# Altium PCB TFTAdapter Version 3.PcbDoc (part 3 of 3)
Units mm, origin at the board's own origin, x right, y up, seen from the top; angles counter-clockwise.
Board outline 130 x 67 mm, 4 copper layers (L1, L2, L3, L4), stack 0.905 mm thick; 77 components, 105 nets, 466 pads, 376 vias.
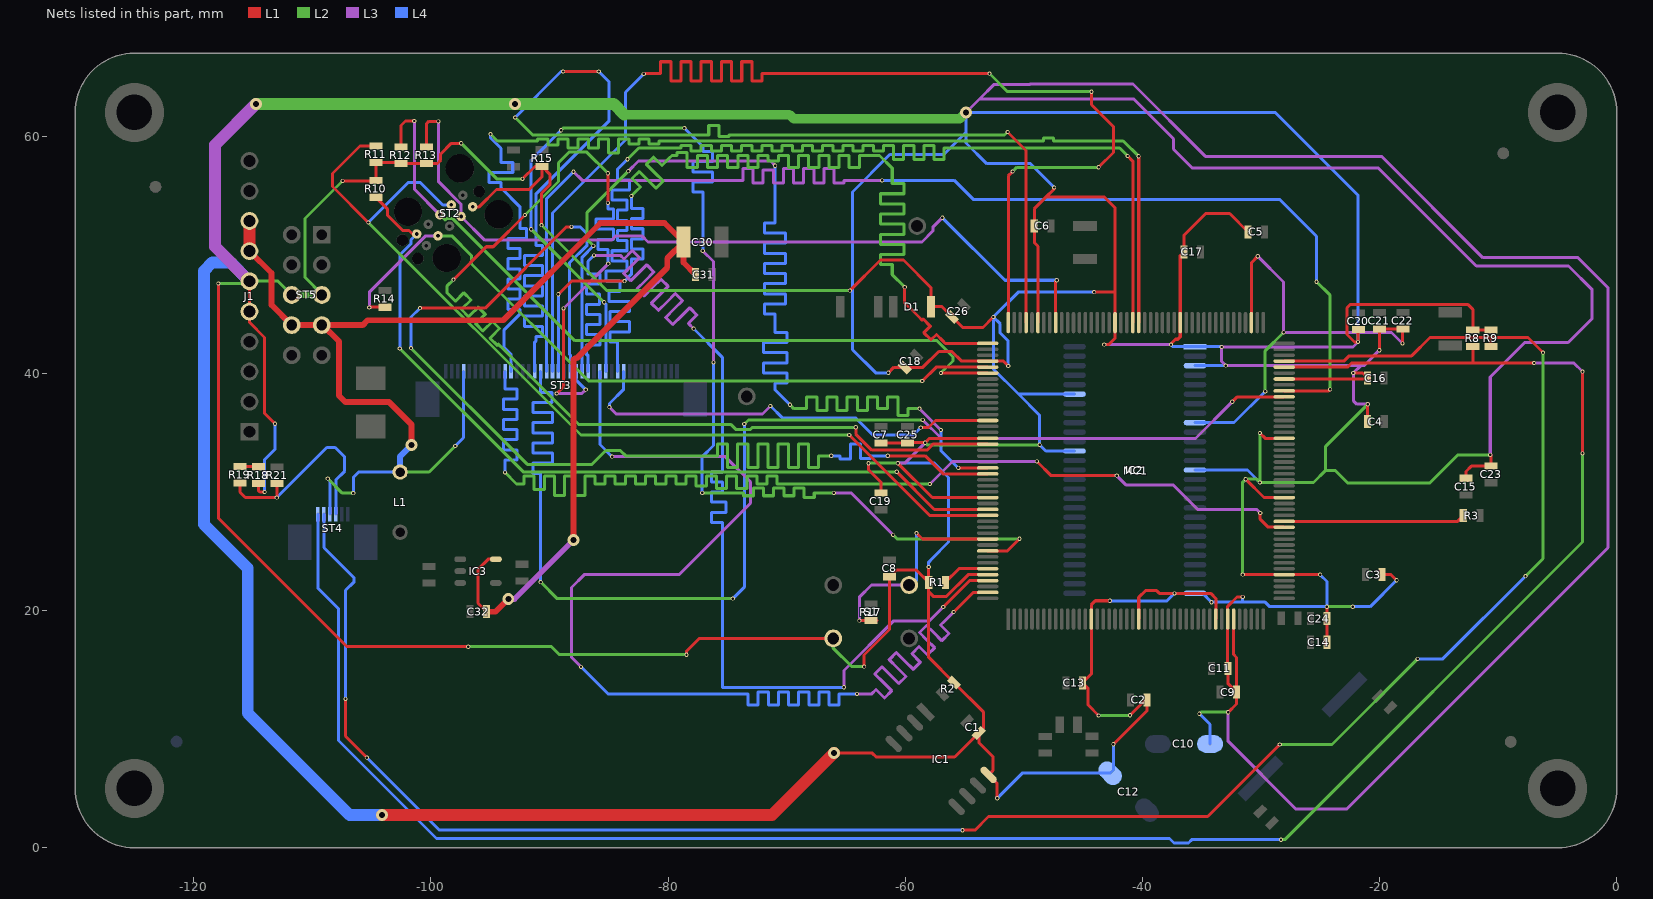
[diagram p5: the nets of this part, all layers, seen from the top]

## Via types
v1: diameter 0.35, hole 0.2, L1 to L4, 362 vias
v2: diameter 1, hole 0.5, L1 to L4, 14 vias

## Nets (pads, with @x,y where several pads share a name; then routed paths per layer and width w, separated by ;. In a path a pad name is that pad's centre, name@x,y a point inside that pad or via, vN(x,y) a via of type N, cw(c..) or ccw(c..) an arc to the next point about the centre after c; other vN are vias at no path point) (continued)
NetMC1_57: MC1.57 ST3.11 | length 111
  L1 w0.254: v1(-48.9,32.575) -47.7,31.375 v1(-42.175,31.375) ; v1(-30.075,28.225) -30.075,27.7 -29.4,27.025 MC1.57@-28.05,27.025
  L3 w0.254: v1(-57.925,30.675) -56.025,32.575 v1(-48.9,32.575) ; v1(-42.175,31.375) -41.4,30.6 -37.425,30.6 -35.325,28.5 -30.35,28.5 v1(-30.075,28.225)
  L2 w0.254: v1(-93.75,31.65) -92.775,30.675 -92.575,30.675 -92.148,30.675 -92.148,31.34 -91.294,31.34 -91.294,30.675 -91.294,30.226 -90.44,30.226 -90.44,30.675 -90.44,31.34 -89.586,31.34 -89.586,30.675 -89.586,29.685 -88.732,29.685 -88.732,30.675 -88.732,31.34 -87.878,31.34 -87.878,30.675 -87.878,29.685 -87.024,29.685 -87.024,30.675 -87.024,31.34 -86.17,31.34 -86.17,30.675 -85.316,30.675 -85.316,31.34 -84.462,31.34 -84.462,30.675 -83.608,30.675 -83.608,31.34 -82.754,31.34 -82.754,30.675 -81.9,30.675 -81.9,31.34 -81.046,31.34 -81.046,30.675 -80.192,30.675 -80.192,31.34 -79.338,31.34 -79.338,30.675 -78.484,30.675 -78.484,31.34 -77.63,31.34 -77.63,30.675 -77.63,30.502 -76.776,30.502 -76.776,30.675 -76.776,31.34 -75.922,31.34 -75.922,30.675 -75.922,30.285 -75.068,30.285 -75.068,30.675 -75.068,31.34 -74.214,31.34 -74.214,30.675 -74.214,30.285 -73.36,30.285 -73.36,30.675 -73.36,31.34 -72.506,31.34 -72.506,30.675 -71.652,30.675 -71.652,31.34 -70.798,31.34 -70.798,30.675 -70.45,30.675 v1(-57.925,30.675)
  L4 w0.254: v1(-93.75,31.65) -93.75,32.025 -93.75,32.695 -92.75,32.695 -92.75,33.549 -93.75,33.549 -93.896,33.549 -93.896,34.403 -93.75,34.403 -92.75,34.403 -92.75,35.257 -93.75,35.257 -93.896,35.257 -93.896,36.111 -93.75,36.111 -92.75,36.111 -92.75,36.965 -93.75,36.965 -93.896,36.965 -93.896,37.819 -93.75,37.819 -92.75,37.819 -92.75,38.673 -93.75,38.673 -93.75,39.1 ST3.11@-93.75,40.175
NetMC1_58: MC1.58 R3.2 | length 15.3
  L1 w0.254: MC1.58@-28.05,27.525 -13.425,27.525 R3.2@-12.95,28
NetMC1_79: MC1.79 ST3.17 | length 110.5
  L1 w0.254: v1(-32.425,37.6) -32,38.025 MC1.79@-28.05,38.025
  L3 w0.254: v1(-58.525,36.075) -56.95,34.5 -35.525,34.5 v1(-32.425,37.6)
  L2 w0.254: v1(-90.75,22.4) -89.35,21 v1(-74.55,21) ; v1(-73.575,35.725) -73.225,36.075 v1(-58.525,36.075)
  L4 w0.254: v1(-90.75,22.4) -90.75,31.125 -90.75,31.566 -91.396,31.566 -91.396,32.42 -90.75,32.42 -89.75,32.42 -89.75,33.274 -90.75,33.274 -91.396,33.274 -91.396,34.128 -90.75,34.128 -89.75,34.128 -89.75,34.982 -90.75,34.982 -91.396,34.982 -91.396,35.836 -90.75,35.836 -89.75,35.836 -89.75,36.69 -90.75,36.69 -91.396,36.69 -91.396,37.544 -90.75,37.544 -89.802,37.544 -89.802,38.398 -90.75,38.398 -90.75,38.825 ST3.17@-90.75,40.175 ; v1(-74.55,21) -73.575,21.975 v1(-73.575,35.725)
NetMC1_80: MC1.80 ST3.18 | length 111.9
  L1 w0.254: MC1.80@-28.05,38.525 -24.3,38.525 v1(-24.175,38.65)
  L3 w0.254: v1(-87.975,57) -87.25,56.275 -73.875,56.275 -73.692,56.275 -73.692,57.275 -72.838,57.275 -72.838,56.275 -72.838,56.054 -71.984,56.054 -71.984,56.275 -71.984,57.129 -71.13,57.129 -71.13,56.275 -71.13,56.054 -70.276,56.054 -70.276,56.275 -70.276,57.275 -69.422,57.275 -69.422,56.275 -69.422,56.054 -68.568,56.054 -68.568,56.275 -68.568,57.275 -67.714,57.275 -67.714,56.275 -67.714,56.054 -66.86,56.054 -66.86,56.275 -66.86,57.275 -66.006,57.275 -66.006,56.275 -66.006,56.054 -65.152,56.054 -65.152,56.275 -64.725,56.275 v1(-61.95,56.275)
  L2 w0.254: v1(-25.325,47.725) -24.175,46.575 v1(-24.175,38.65)
  L4 w0.254: ST3.18@-90.25,40.175 -90.25,54.725 v1(-87.975,57) ; v1(-61.95,56.275) -55.875,56.275 -54.275,54.675 -28.45,54.675 -25.325,51.55 v1(-25.325,47.725)
NetMC1_84: MC1.84 R8.1 ST4.1 | length 180.1
  L1 w0.254: MC1.84@-28.05,40.525 -22.725,40.525 -22.375,40.875 -12.175,40.875 ; R8.1@-12.15,42.25 -12.15,40.9 -12.175,40.875 ; v1(-6.975,40.875) -12.175,40.875 ; v1(-2.9,33.25) v1(-2.9,40.15)
  L3 w0.254: v1(-6.975,40.875) -3.625,40.875 v1(-2.9,40.15)
  L2 w0.254: v1(-28.325,0.675) -28,0.675 -2.9,25.775 v1(-2.9,33.25)
  L4 w0.254: ST4.1@-109.525,28.125 -109.525,21.875 -107.8,20.15 -107.8,9.05 -99.525,0.775 -37.725,0.775 -37.35,0.4 -36.125,0.4 -35.85,0.675 v1(-28.325,0.675)
NetMC1_85: MC1.85 R9.1 ST4.2 | length 175.2
  L1 w0.254: v1(-107.2,12.55) -107.2,9.4 v1(-105.4,7.6) ; v1(-55.175,1.475) -54.131,1.475 -52.981,2.625 -34.5,2.625 v1(-28.425,8.7) ; MC1.85@-28.05,41.025 -23.025,41.025 -22.575,41.475 -17.3,41.475 -15.75,43.025 -10.65,43.025 ; R9.1@-10.625,42.25 -10.625,43 -10.65,43.025 ; v1(-6.225,41.75) -7.5,43.025 -10.65,43.025
  L2 w0.254: v1(-28.425,8.7) -24.025,8.7 v1(-16.8,15.925) ; v1(-7.7,22.9) -6.225,24.375 v1(-6.225,41.75)
  L4 w0.254: ST4.2@-109.025,28.125 -109.025,25.3 -106.475,22.75 -106.475,22.425 -107.2,21.7 v1(-107.2,12.55) ; v1(-105.4,7.6) -99.275,1.475 v1(-55.175,1.475) ; v1(-16.8,15.925) -14.675,15.925 v1(-7.7,22.9)
NetMC1_110: MC1.110 ST3.12 | length 112.7
  L1 w0.254: v1(-40.325,58.3) -40.315,58.29 MC1.110@-40.315,44.279
  L2 w0.254: v1(-94.975,60.175) -94.4,59.6 -91.425,59.6 -90.998,59.6 -90.998,59.744 -90.144,59.744 -90.144,59.6 -90.144,59.252 -89.29,59.252 -89.29,59.6 -89.29,59.744 -88.436,59.744 -88.436,59.6 -88.436,59.004 -87.582,59.004 -87.582,59.6 -87.582,59.744 -86.728,59.744 -86.728,59.6 -86.728,58.982 -85.874,58.982 -85.874,59.6 -85.874,59.744 -85.02,59.744 -85.02,59.6 -85.02,58.6 -84.166,58.6 -84.166,59.6 -84.166,59.744 -83.312,59.744 -83.312,59.6 -83.312,59.354 -82.458,59.354 -82.458,59.6 -82.458,59.744 -81.604,59.744 -81.604,59.6 -81.604,59.354 -80.75,59.354 -80.75,59.6 -74.825,59.6 -48.775,59.6 -48.348,59.6 -48.348,59.839 -47.494,59.839 -47.494,59.6 -43.525,59.6 -41.625,59.6 v1(-40.325,58.3)
  L4 w0.254: v1(-94.975,60.175) -94.975,59.85 -94.1,58.975 -94.1,58.639 -94.1,57.785 -93.1,57.785 -93.1,56.931 -94.1,56.931 -95.1,56.931 -95.1,56.077 -94.1,56.077 -94.1,55.65 -92.5,54.05 -92.5,52.375 -92.5,52.234 -91.952,52.234 -91.952,51.38 -92.5,51.38 -93.5,51.38 -93.5,50.526 -92.5,50.526 -92.5,49.672 -93.5,49.672 -93.5,48.818 -92.5,48.818 -92.5,47.964 -93.5,47.964 -93.5,47.11 -92.5,47.11 -92.5,46.256 -93.5,46.256 -93.5,45.402 -92.5,45.402 -92.5,44.975 -93.85,43.625 -93.85,42.225 -93.25,41.625 ST3.12@-93.25,40.175
NetMC1_111: MC1.111 ST3.30 | length 112.7
  L1 w0.254: v1(-41.25,58.325) -40.815,57.89 MC1.111@-40.815,44.279
  L2 w0.254: v1(-83.425,58.05) -82.475,59 -79.35,59 -78.923,59 -78.923,59.225 -78.069,59.225 -78.069,59 -78.069,58.75 -77.215,58.75 -77.215,59 -77.215,59.225 -76.361,59.225 -76.361,59 -76.361,58.75 -75.507,58.75 -75.507,59 -75.507,59.225 -74.653,59.225 -74.653,59 -74.653,58.75 -73.799,58.75 -73.799,59 -73.799,59.225 -72.945,59.225 -72.945,59 -72.945,58.75 -72.091,58.75 -72.091,59 -72.091,59.225 -71.237,59.225 -71.237,59 -71.237,58.75 -70.383,58.75 -70.383,59 -70.383,59.225 -69.529,59.225 -69.529,59 -69.529,58.75 -68.675,58.75 -68.675,59 -68.675,59.225 -67.821,59.225 -67.821,59 -67.821,58.75 -66.967,58.75 -66.967,59 -66.967,59.225 -66.113,59.225 -66.113,59 -66.113,58.75 -65.259,58.75 -65.259,59 -65.259,59.225 -64.405,59.225 -64.405,59 -64.405,58.75 -63.551,58.75 -63.551,59 -63.551,59.225 -62.697,59.225 -62.697,59 -62.697,58.75 -61.843,58.75 -61.843,59 -61.843,59.225 -60.989,59.225 -60.989,59 -60.989,58.021 -60.135,58.021 -60.135,59 -60.135,59.225 -59.281,59.225 -59.281,59 -59.281,58.021 -58.427,58.021 -58.427,59 -58.427,59.225 -57.573,59.225 -57.573,59 -57.573,58.021 -56.719,58.021 -56.719,59 -54.35,59 -41.925,59 v1(-41.25,58.325)
  L4 w0.254: ST3.30@-84.25,40.175 -84.25,42.225 -84.25,42.652 -84.896,42.652 -84.896,43.506 -84.25,43.506 -83.25,43.506 -83.25,44.36 -84.25,44.36 -84.896,44.36 -84.896,45.214 -84.25,45.214 -83.25,45.214 -83.25,46.068 -84.25,46.068 -84.971,46.068 -84.971,46.922 -84.25,46.922 -84.077,46.922 -84.077,47.776 -84.25,47.776 -85.25,47.776 -85.25,48.63 -84.25,48.63 -83.454,48.63 -83.454,49.484 -84.25,49.484 -84.721,49.484 -84.721,50.338 -84.25,50.338 -83.454,50.338 -83.454,51.192 -84.25,51.192 -84.25,52.046 -83.454,52.046 -83.454,52.9 -84.25,52.9 -84.25,53.754 -83.454,53.754 -83.454,54.608 -84.25,54.608 -84.747,54.608 -84.747,55.462 -84.25,55.462 -83.25,55.462 -83.25,56.316 -84.25,56.316 -84.25,57.1 -84.25,57.225 v1(-83.425,58.05)
NetMC1_124: MC1.124 R13.1 ST2.2 | length 70.1
  L1 w0.254: R13.1@-100.375,59.1 -100.375,61.05 -100.175,61.25 v1(-99.375,61.25) ; MC1.124@-47.315,44.279 -47.315,47.76 v1(-47.225,47.85)
  L3 w0.254: v1(-99.375,61.25) -99.375,56.187 -97.459,54.27 ST2.2@-97.459,53.227 -95.457,51.225 -84.775,51.225 -84.4,51.6 -82.225,51.6 -81.7,51.075 -58.6,51.075 -57.675,52 -57.675,52.325 v1(-56.875,53.125)
  L4 w0.254: v1(-56.875,53.125) -51.6,47.85 v1(-47.225,47.85)
NetMC1_129: MC1.129 ST3.16 | length 111
  L1 w0.254: v1(-88.85,65.45) v1(-85.85,65.45) ; v1(-51.375,60.35) -49.815,58.79 MC1.129@-49.815,44.279
  L2 w0.254: v1(-92.9,61.575) -91.423,60.098 -77,60.098 -76.573,60.098 -76.573,60.919 -75.719,60.919 -75.719,60.098 -75.719,59.971 -74.865,59.971 -74.865,60.098 -73.125,60.098 -51.627,60.098 v1(-51.375,60.35)
  L4 w0.254: v1(-92.9,61.575) -89.025,65.45 v1(-88.85,65.45) ; ST3.16@-91.25,40.175 -91.25,42.625 -91.125,42.75 -91.125,43.112 -90.604,43.112 -90.604,43.966 -91.125,43.966 -92.125,43.966 -92.125,44.82 -91.125,44.82 -90.604,44.82 -90.604,45.674 -91.125,45.674 -92.125,45.674 -92.125,46.528 -91.125,46.528 -90.604,46.528 -90.604,47.382 -91.125,47.382 -92.125,47.382 -92.125,48.236 -91.125,48.236 -90.604,48.236 -90.604,49.09 -91.125,49.09 -92.125,49.09 -92.125,49.944 -91.125,49.944 -90.604,49.944 -90.604,50.798 -91.125,50.798 -91.125,51.225 -91.125,55.15 -84.975,61.3 -84.975,64.575 v1(-85.85,65.45)
NetMC1_132: MC1.132 ST3.19 | length 110.8
  L1 w0.254: v1(-82.05,65.25) -82.025,65.275 -81.05,65.275 -80.623,65.275 -80.623,66.275 -79.769,66.275 -79.769,65.275 -79.769,64.652 -78.915,64.652 -78.915,65.275 -78.915,66.275 -78.061,66.275 -78.061,65.275 -78.061,64.652 -77.207,64.652 -77.207,65.275 -77.207,66.275 -76.353,66.275 -76.353,65.275 -76.353,64.652 -75.499,64.652 -75.499,65.275 -75.499,66.275 -74.645,66.275 -74.645,65.275 -74.645,64.652 -73.791,64.652 -73.791,65.275 -73.791,66.275 -72.937,66.275 -72.937,65.275 -72.937,64.652 -72.083,64.652 -72.083,65.275 -68.775,65.275 v1(-52.9,65.275) ; MC1.132@-51.315,44.279 -51.315,56.66 v1(-50.95,57.025) ; v1(-44.3,63.75) -44.3,62.65 -42.45,60.8 -42.45,58.625 v1(-43.7,57.375)
  L2 w0.254: v1(-52.9,65.275) -51.375,63.75 v1(-44.3,63.75) ; v1(-50.95,57.025) -50.6,57.375 v1(-43.7,57.375)
  L4 w0.254: ST3.19@-89.75,40.175 -89.75,53.525 -83.6,59.675 -83.6,63.7 v1(-82.05,65.25)
NetMC1_133: MC1.133 ST3.20 | length 111
  L1 w0.254: v1(-89.25,46.675) -88.15,47.775 v1(-83.675,47.775) ; v1(-60.05,47.275) -60.05,45.95 -58.887,44.787 -58.586,44.486 -58.496,44.575 -57.892,43.971 -57.982,43.882 -58.433,43.431 -57.829,42.827 -57.378,43.278 -56.85,42.75 -56.625,42.525 MC1.133@-53.05,42.525
  L2 w0.254: v1(-83.1,54.95) -82.638,55.412 -82.336,55.714 -83.043,56.422 -82.439,57.025 -81.732,56.318 -81.025,55.611 -80.421,56.215 -81.128,56.922 -81.835,57.629 -81.231,58.233 -80.524,57.526 -79.92,58.13 -79.675,58.375 -79.248,58.375 -79.248,58.61 -78.394,58.61 -78.394,58.375 -78.394,57.375 -77.54,57.375 -77.54,58.375 -76.686,58.375 -76.686,57.375 -75.832,57.375 -75.832,58.375 -74.978,58.375 -74.978,57.375 -74.124,57.375 -74.124,58.375 -73.27,58.375 -73.27,57.375 -72.416,57.375 -72.416,58.375 -71.562,58.375 -71.562,57.902 -70.708,57.902 -70.708,58.375 -69.854,58.375 -69.854,57.375 -69,57.375 -69,58.375 -68.146,58.375 -68.146,57.375 -67.292,57.375 -67.292,58.375 -66.438,58.375 -66.438,57.375 -65.584,57.375 -65.584,58.375 -64.73,58.375 -64.73,57.375 -63.876,57.375 -63.876,58.375 -63.022,58.375 -62.425,58.375 -62.175,58.375 -61.1,57.3 -61.1,56.425 -61.1,55.998 -60.1,55.998 -60.1,55.144 -61.1,55.144 -62.1,55.144 -62.1,54.29 -61.1,54.29 -60.1,54.29 -60.1,53.436 -61.1,53.436 -62.1,53.436 -62.1,52.582 -61.1,52.582 -60.1,52.582 -60.1,51.728 -61.1,51.728 -62.1,51.728 -62.1,50.874 -61.1,50.874 -60.1,50.874 -60.1,50.02 -61.1,50.02 -62.1,50.02 -62.1,49.166 -61.1,49.166 -61.1,48.325 v1(-60.05,47.275)
  L4 w0.254: ST3.20@-89.25,40.175 v1(-89.25,46.675) ; v1(-83.675,47.775) -83.1,48.35 -83.1,48.777 -83.1,49.631 -82.1,49.631 -82.1,50.485 -83.1,50.485 -83.1,51.339 -82.1,51.339 -82.1,52.193 -83.1,52.193 -83.1,53.047 -82.1,53.047 -82.1,53.901 -83.1,53.901 -83.1,54.5 v1(-83.1,54.95)
NetMC1_137: MC1.137 R14.2 ST2.4 | length 62.7
  L1 w0.254: v1(-105.2,45.55) -105.175,45.575 R14.2@-103.875,45.575 ; v1(-58.575,39.35) -57.4,40.525 MC1.137@-53.05,40.525
  L3 w0.254: v1(-105.2,45.55) -105.2,46.842 -100.448,51.594 ST2.4@-99.404,51.594
  L2 w0.254: ST2.4@-99.404,51.594 -98.244,51.594 -96.573,49.923 -96.573,49.223 -86.7,39.35 v1(-58.575,39.35)
NetMC1_138: MC1.138 R12.1 ST2.8 | length 65.9
  L1 w0.254: R12.1@-102.525,59.1 -102.525,60.9 -102.15,61.275 v1(-101.4,61.275) ; v1(-57,40.025) MC1.138@-53.05,40.025
  L3 w0.254: v1(-101.4,61.275) -101.4,55.536 ST2.8@-99.248,53.384
  L2 w0.254: ST2.8@-99.248,53.384 -98.797,52.932 -98.691,53.038 -98.156,53.038 -87.868,42.75 -57.325,42.75 -55.975,41.4 -55.975,41.05 v1(-57,40.025)
NetMC1_146: MC1.146 ST3.31 | length 37.5
  L1 w0.254: v1(-58.7,35.425) -58.05,35.425 -57.45,36.025 MC1.146@-53.05,36.025
  L3 w0.254: v1(-84.95,37.15) -84.375,36.575 -72.05,36.575 v1(-71.375,37.25)
  L4 w0.254: v1(-84.95,37.15) -84.95,37.45 -83.75,38.65 ST3.31@-83.75,40.175 ; v1(-71.375,37.25) -70.375,36.25 -64.2,36.25 -62.75,34.8 -59.325,34.8 v1(-58.7,35.425)
NetMC1_150: MC1.150 ST3.23 | length 109.5
  L1 w0.254: v1(-98.1,47.9) -95.325,50.675 -94.75,50.675 v1(-92.075,53.35) ; v1(-89.4,38.3) -88.825,38.875 v1(-88.825,45.475) ; v1(-85.075,54.375) v1(-85.075,56.875) ; v1(-64.175,35.45) -64.175,34.875 -62.825,33.525 -58.175,33.525 -57.675,34.025 MC1.150@-53.05,34.025
  L3 w0.254: v1(-89.4,38.3) -87.275,38.3 v1(-86.95,38.625) ; v1(-88.825,45.475) v1(-85.05,49.25)
  L2 w0.254: v1(-98.1,47.9) -98.625,47.375 -98.625,46.775 -98.237,46.387 -97.936,46.086 -97.228,46.793 -96.625,46.189 -97.332,45.482 -97.431,45.382 -96.828,44.778 -96.728,44.878 -96.021,45.585 -95.417,44.981 -96.124,44.274 -96.224,44.174 -95.62,43.57 -95.52,43.67 -94.813,44.377 -94.209,43.773 -94.916,43.066 -95.016,42.967 -94.412,42.363 -94.312,42.462 -93.875,42.025 -87.55,35.7 -74.725,35.7 -74.3,35.275 -73.05,35.275 -72.875,35.45 v1(-64.175,35.45) ; v1(-92.075,53.35) -89.25,56.175 -89.25,57.75 -88.35,58.65 -86.85,58.65 v1(-85.075,56.875)
  L4 w0.254: ST3.23@-87.75,40.175 -87.75,39.425 v1(-86.95,38.625) ; v1(-85.075,54.375) -85.075,54.1 -85.075,53.868 -84.604,53.868 -84.604,53.014 -85.075,53.014 -86.075,53.014 -86.075,52.16 -85.075,52.16 -84.604,52.16 -84.604,51.306 -85.075,51.306 -85.898,51.306 -85.898,50.452 -85.075,50.452 -85.075,50.025 -85.075,49.275 v1(-85.05,49.25)
NetMC1_154: MC1.154 ST3.24 | length 110.4
  L1 w0.254: v1(-55.525,32.025) MC1.154@-53.05,32.025
  L3 w0.254: v1(-83.35,57.05) -82.5,57.9 -71.375,57.9 v1(-70.975,57.5) ; v1(-58.8,37.025) v1(-57,35.225)
  L2 w0.254: v1(-86.3,50.75) -86.825,51.275 -86.825,53.575 v1(-83.35,57.05) ; v1(-69.725,37.35) -69.4,37.025 -69.125,37.025 -68.317,37.025 -68.317,38.025 -67.463,38.025 -67.463,37.025 -67.463,36.879 -66.609,36.879 -66.609,37.025 -66.609,38.025 -65.755,38.025 -65.755,37.025 -65.755,36.879 -64.901,36.879 -64.901,37.025 -64.901,38.025 -64.047,38.025 -64.047,37.025 -64.047,36.879 -63.193,36.879 -63.193,37.025 -63.193,38.025 -62.339,38.025 -62.339,37.025 -61.485,37.025 -61.485,38.025 -60.631,38.025 -60.631,37.025 -60.631,36.429 -59.777,36.429 -59.777,37.025 -59.35,37.025 v1(-58.8,37.025)
  L4 w0.254: ST3.24@-87.25,40.175 -87.25,49.8 v1(-86.3,50.75) ; v1(-70.975,57.5) -70.975,53.05 -70.975,52.688 -71.86,52.688 -71.86,51.834 -70.975,51.834 -70.09,51.834 -70.09,50.98 -70.975,50.98 -71.86,50.98 -71.86,50.126 -70.975,50.126 -70.09,50.126 -70.09,49.272 -70.975,49.272 -71.86,49.272 -71.86,48.418 -70.975,48.418 -70.09,48.418 -70.09,47.564 -70.975,47.564 -71.86,47.564 -71.86,46.71 -70.975,46.71 -70.09,46.71 -70.09,45.856 -70.975,45.856 -71.86,45.856 -71.86,45.002 -70.975,45.002 -70.975,44.575 -70.975,43.875 -70.975,43.448 -69.975,43.448 -69.975,42.594 -70.975,42.594 -71.975,42.594 -71.975,41.74 -70.975,41.74 -69.975,41.74 -69.975,40.886 -70.975,40.886 -71.975,40.886 -71.975,40.032 -70.975,40.032 -69.975,40.032 -69.975,39.178 -70.975,39.178 -70.975,38.6 v1(-69.725,37.35) ; v1(-57,35.225) -57,33.5 v1(-55.525,32.025)
NetMC1_155: MC1.155 ST3.22 | length 109.8
  L1 w0.254: v1(-100.925,45.5) -95.425,45.5 -88.575,52.35 v1(-88.15,52.35) ; v1(-61.475,33.05) -58.325,33.05 -56.8,31.525 MC1.155@-53.05,31.525
  L2 w0.254: v1(-101.675,42.125) -91.875,32.325 -86.425,32.325 -85.25,33.5 -84.025,33.5 -83.575,33.05 -76.6,33.05 -75.842,33.05 -75.842,34.039 -74.988,34.039 -74.988,33.05 -74.988,32.065 -74.134,32.065 -74.134,33.05 -74.134,34.039 -73.28,34.039 -73.28,33.05 -73.28,32.065 -72.426,32.065 -72.426,33.05 -72.426,34.039 -71.572,34.039 -71.572,33.05 -71.572,32.065 -70.718,32.065 -70.718,33.05 -70.718,34.039 -69.864,34.039 -69.864,33.05 -69.864,32.065 -69.01,32.065 -69.01,33.05 -69.01,34.039 -68.156,34.039 -68.156,33.05 -68.156,32.065 -67.302,32.065 -67.302,33.05 -66.875,33.05 v1(-66.25,33.05)
  L4 w0.254: v1(-101.675,42.125) -101.675,44.75 v1(-100.925,45.5) ; ST3.22@-88.25,40.175 -88.25,41.556 -88.327,41.633 -88.327,49.298 -86.825,50.8 -86.825,51.75 -87.425,52.35 v1(-88.15,52.35) ; v1(-66.25,33.05) -65.65,33.05 -65.489,33.05 -65.489,32.787 -64.635,32.787 -64.635,33.05 -64.635,34.05 -63.781,34.05 -63.781,33.05 -63.781,32.827 -62.927,32.827 -62.927,33.05 -62.5,33.05 v1(-61.475,33.05)
NetMC1_161: MC1.161 R10.1 ST2.6 | length 70.5
  L1 w0.254: R10.1@-104.65,54.85 -103.675,53.875 -103.675,53.344 -102.381,52.05 -101.85,52.05 -101.551,51.751 ST2.6@-101.194,51.751 ; v1(-60.725,31.7) -57.55,28.525 MC1.161@-53.05,28.525
  L2 w0.254: v1(-102.625,42.1) -92.225,31.7 v1(-60.725,31.7)
  L4 w0.254: v1(-102.625,42.1) -102.625,49.983 -101.684,50.925 -101.684,51.261 ST2.6@-101.194,51.751
NetMC1_162: MC1.162 R11.1 ST2.9 | length 81.6
  L1 w0.254: v1(-105.275,52.725) -108.3,55.75 -108.3,56.85 -105.975,59.175 R11.1@-104.65,59.175 ; v1(-64.725,34.8) -57.95,28.025 MC1.162@-53.05,28.025
  L2 w0.254: v1(-105.275,52.725) -87.35,34.8 v1(-64.725,34.8)
  L4 w0.254: v1(-105.275,52.725) -101.925,56.075 -100.875,56.075 -99,54.2 ST2.9@-98.275,54.2
NetMC1_166: MC1.166 R17.2 S1.3 | length 19
  L1 w0.254: v1(-63.875,19.15) R17.2@-62.9,19.15 R17.2@-62.4,19.15 ; v1(-59.05,26.525) -58.55,26.025 MC1.166@-53.05,26.025
  L3 w0.254: v1(-63.875,19.15) -63.875,21.125 -62.85,22.15 S1.3@-59.675,22.15
  L4 w0.254: S1.3@-59.575,21.975 -59.05,22.5 v1(-59.05,26.525)
NetMC1_168: MC1.168 ST3.28 | length 109.2
  L1 w0.254: MC1.168@-53.05,25.025 -51.4,25.025 v1(-50.375,26.05)
  L3 w0.254: v1(-77.075,50.325) -76.175,49.425 v1(-76.175,40.925) ; v1(-66.025,29.925) -64.575,29.925 v1(-61.025,26.375)
  L2 w0.254: v1(-91.55,52.15) v1(-85.4,46) ; v1(-89.025,60.5) -88.85,60.675 v1(-78.625,60.675) ; v1(-77.125,29.925) -74.2,29.925 -73.655,29.925 -73.655,29.679 -72.801,29.679 -72.801,29.925 -72.801,30.321 -71.947,30.321 -71.947,29.925 -71.947,29.679 -71.093,29.679 -71.093,29.925 -71.093,30.321 -70.239,30.321 -70.239,29.925 -70.239,29.679 -69.385,29.679 -69.385,29.925 -69.385,30.321 -68.531,30.321 -68.531,29.925 -68.531,29.533 -67.677,29.533 -67.677,29.925 -67.25,29.925 v1(-66.025,29.925) ; v1(-61.025,26.375) -60.7,26.05 v1(-50.375,26.05)
  L4 w0.254: v1(-91.55,52.15) -91.55,57.975 v1(-89.025,60.5) ; v1(-85.4,46) -85.25,45.85 ST3.28@-85.25,40.175 ; v1(-78.625,60.675) -77.075,59.125 -77.075,58.698 -76.261,58.698 -76.261,57.844 -77.075,57.844 -77.889,57.844 -77.889,56.99 -77.075,56.99 -76.261,56.99 -76.261,56.136 -77.075,56.136 -77.889,56.136 -77.889,55.282 -77.075,55.282 -77.075,54.425 v1(-77.075,50.325) ; v1(-77.125,29.925) -77.125,32.975 -76.175,33.925 v1(-76.175,40.925)
NetMC1_171: MC1.171 R1.1 | length 4.1
  L1 w0.254: R1.1@-56.625,22.375 -55.475,23.525 MC1.171@-53.05,23.525
NetMC1_173: MC1.173 ST3.25 | length 112.1
  L1 w0.254: v1(-56.8,20.3) -54.575,22.525 MC1.173@-53.05,22.525
  L3 w0.254: v1(-86.25,49.95) -84.025,49.95 -83.723,49.648 -83.016,50.355 -82.412,49.751 -83.119,49.044 -83.747,48.416 -83.144,47.812 -82.515,48.44 -81.808,49.147 -81.204,48.544 -81.911,47.836 -82.619,47.129 -82.015,46.525 -81.308,47.233 -80.6,47.94 -79.997,47.336 -80.704,46.629 -81.411,45.922 -80.807,45.318 -80.1,46.025 -79.393,46.732 -78.789,46.128 -79.496,45.421 -80.203,44.714 -79.599,44.11 -78.892,44.817 -78.185,45.524 -77.581,44.92 -78.288,44.213 -78.25,44.175 v1(-77.85,43.775) ; v1(-65.175,13.525) -65.175,14.95 -61.025,19.1 -58,19.1 v1(-56.8,20.3)
  L4 w0.254: ST3.25@-86.75,40.175 -86.75,41.125 -86.75,41.552 -86.896,41.552 -86.896,42.406 -86.75,42.406 -85.75,42.406 -85.75,43.26 -86.75,43.26 -86.896,43.26 -86.896,44.114 -86.75,44.114 -85.75,44.114 -85.75,44.968 -86.75,44.968 -86.896,44.968 -86.896,45.822 -86.75,45.822 -85.802,45.822 -85.802,46.676 -86.75,46.676 -86.896,46.676 -86.896,47.53 -86.75,47.53 -85.75,47.53 -85.75,48.384 -86.75,48.384 -86.75,49.238 -86.75,49.45 v1(-86.25,49.95) ; v1(-77.85,43.775) -75.425,41.35 -75.425,32.975 -75.425,32.548 -75.425,31.694 -76.351,31.694 -76.351,30.84 -75.425,30.84 -75.425,29.986 -76.351,29.986 -76.351,29.132 -75.425,29.132 -75.13,29.132 -75.13,28.278 -75.425,28.278 -76.351,28.278 -76.351,27.424 -75.425,27.424 -75.425,26.225 -75.425,13.525 v1(-65.175,13.525)
NetMC1_175: MC1.175 ST3.27 | length 112.1
  L1 w0.254: v1(-55.925,19.875) -54.275,21.525 MC1.175@-53.05,21.525
  L3 w0.254: v1(-87.35,15.25) -88.15,16.05 -88.15,21.95 -87.075,23.025 -79.075,23.025 -73.05,29.05 -73.05,30.85 -75.175,32.975 v1(-84.725,32.975) ; v1(-64.075,12.975) -62.825,12.975 -62.462,13.338 -61.755,12.631 -61.151,13.235 -61.858,13.942 -62.565,14.649 -61.961,15.253 -61.254,14.546 -60.547,13.839 -59.943,14.443 -60.65,15.15 -61.357,15.857 -60.753,16.461 -60.046,15.754 -59.339,15.047 -58.735,15.65 -59.442,16.358 -58.839,16.961 -58.131,16.254 -57.528,16.858 -58.235,17.565 -58.812,18.142 -58.208,18.746 -57.631,18.169 -56.924,17.462 -56.32,18.066 -57.027,18.773 -56.725,19.075 v1(-55.925,19.875)
  L4 w0.254: v1(-87.35,15.25) -85.075,12.975 -73.675,12.975 -73.263,12.975 -73.263,12.026 -72.409,12.026 -72.409,12.975 -72.409,13.12 -71.555,13.12 -71.555,12.975 -71.555,12.026 -70.701,12.026 -70.701,12.975 -70.701,13.12 -69.847,13.12 -69.847,12.975 -69.847,12.026 -68.993,12.026 -68.993,12.975 -68.993,13.12 -68.139,13.12 -68.139,12.975 -68.139,12.026 -67.285,12.026 -67.285,12.975 -67.285,13.12 -66.431,13.12 -66.431,12.975 -66.431,12.026 -65.577,12.026 -65.577,12.975 -65.15,12.975 v1(-64.075,12.975) ; ST3.27@-85.75,40.175 -85.75,34 v1(-84.725,32.975)
NetR18_1: R18.1 R19.2 | length 1.6
  L1 w0.254: R19.2@-116.1,32.15 -114.575,32.15 R18.1@-114.55,32.125
NetR19_1: R19.1 R21.2 ST4.4 | length 18.2
  L1 w0.254: R19.1@-116.1,30.75 -116.1,29.975 -115.65,29.525 v1(-113,29.525) -113,30.675 R21.2@-112.975,30.7
  L4 w0.254: v1(-113,29.525) -108.775,33.75 -108.075,33.75 -107.275,32.95 -107.275,31.75 -108.025,31 ST4.4@-108.025,28.125
VCC: C1.2 C2.2 C3.2 C4.2 C5.2 C6.2 C7.2 C8.2 C9.2 C10.1 C11.2 C12.1 C13.2 C14.2 C15.2 C16.2 C17.2 C18.2 C19.2 C20.2 C21.2 C22.2 C23.2 C24.2 C25.2 C26.2 D1.A IC1.8 IC2.1 IC2.3 IC2.9 IC2.14 IC2.27 IC2.43 IC2.49 J1.5 J1.6 MC1.15 MC1.23 MC1.36 MC1.38 MC1.39 MC1.49 MC1.62 MC1.72 MC1.82 MC1.91 MC1.103 MC1.114 MC1.127 MC1.136 MC1.149 MC1.159 MC1.172 R1.2 R2.2 R8.2 R9.2 R10.2 R11.2 R12.2 R13.2 R15.2 R18.2 S1.1 ST2.1 ST5.5 ST5.6 | length 1153.2
  L1 w0.254: v1(-117.925,47.575) -117.925,27.8 -107.075,16.95 v1(-96.85,16.95) ; J1.6@-115.3,47.77 J1.5@-115.3,45.21 -115.3,44.3 -114.03,43.03 -114.03,36.63 v1(-113.15,35.75) ; R18.2@-114.55,30.725 -114.55,30.125 -114.425,30 v1(-114.025,30) ; v1(-107.45,56.225) -104.675,56.225 R10.2@-104.65,56.25 R11.2@-104.65,57.775 -102.6,57.775 R12.2@-102.525,57.7 R13.2@-100.375,57.7 -99.45,57.7 -99.175,57.975 -99.175,58.5 -98.275,59.4 v1(-97.45,59.4) ; ST2.1@-96.486,54.043 -95.932,54.043 -94.475,55.5 -91.7,55.5 -90.625,56.575 R15.2@-90.625,57.45 ; v1(-92.275,56.4) -91.225,57.45 R15.2@-90.625,57.45 ; v1(-90.675,52.5) -90.675,55.175 -89.975,55.875 -89.975,56.8 R15.2@-90.625,57.45 ; v1(-78.45,16.275) -78.45,16.575 -77.375,17.65 S1.1@-66.075,17.65 ; v2(-66.025,7.975) -62.775,7.975 -62.45,7.65 -55.835,7.65 C1.2@-53.805,9.68 ; v1(-64.675,46.975) -62.1,49.55 -60.15,49.55 -57.825,47.225 D1.A@-57.825,45.625 -57.815,45.635 -56.925,45.635 C26.2@-56.045,44.755 -55.165,43.875 -53.45,43.875 v1(-52.575,44.75) ; v1(-63.475,15.275) -63.475,16.25 -61.325,18.4 C8.2@-61.325,22.85 -60.775,23.4 -59.05,23.4 R1.2@-58.025,22.375 ; v1(-63.1,32.425) -63.1,31.871 -62.05,30.821 C19.2@-62.05,29.9 ; C7.2@-62.05,34.125 C25.2@-59.8,34.125 -59.775,34.15 v1(-58.325,34.15) -57.95,34.525 MC1.149@-53.05,34.525 ; v1(-61.425,40.05) -60.97,40.505 C18.2@-60.045,40.505 -58.52,40.505 -57.175,41.85 -56.075,41.85 -55.25,41.025 MC1.136@-53.05,41.025 -51.725,41.025 v1(-51.325,40.625) ; v1(-60.625,32.425) -57.725,29.525 MC1.159@-53.05,29.525 ; v1(-58.025,23.675) R1.2@-58.025,22.375 ; MC1.172@-53.05,23.025 -54.7,23.025 -56.525,21.2 -57.65,21.2 -58.025,21.575 ; v1(-52.25,4.175) -52.25,5.419 IC1.8@-52.976,6.145 -52.625,6.497 -52.625,7.7 -53.805,8.88 C1.2@-53.805,9.68 ; MC1.127@-48.815,44.279 -48.815,50.715 -49.125,51.025 C6.2@-49.125,52.425 -49.125,53.875 -48.15,54.85 ; v1(-47.45,55.675) -47.45,55.55 -48.15,54.85 ; v1(-44.075,46.85) -42.315,46.85 ; v1(-43.7,11.15) -44.575,12.025 -44.575,13.41 C13.2@-45.065,13.9 -44.315,14.65 MC1.15@-44.315,19.279 -44.315,20.485 -43.975,20.825 v1(-42.75,20.825) ; v1(-43.225,42.425) -42.85,42.425 -42.315,42.96 MC1.114@-42.315,44.279 -42.315,46.85 ; v1(-42.45,8.725) -39.625,11.55 C2.2@-39.625,12.475 -39.75,12.475 v1(-41.05,11.175) ; MC1.23@-40.315,19.279 -40.315,21.11 -39.75,21.675 -38.8,21.675 -38.575,21.45 v1(-37.3,21.45) -34.25,21.45 -33.815,21.015 MC1.36@-33.815,19.279 ; v1(-37.6,42.425) -37.6,42.5 -37.225,42.875 -37.025,42.875 -36.815,43.085 MC1.103@-36.815,44.279 -36.815,49.935 C17.2@-36.5,50.25 -36.5,51.646 -34.671,53.475 -32.65,53.475 C5.2@-31.1,51.925 ; v1(-32.775,11.425) -32.075,12.125 C9.2@-32.075,13.125 ; MC1.39@-32.315,19.279 -32.315,16.286 -32.075,16.046 C9.2@-32.075,13.125 ; v1(-31.55,21.15) -32.025,21.15 -32.815,20.36 MC1.38@-32.815,19.279 -32.815,15.165 C11.2@-32.775,15.125 -32.775,13.825 C9.2@-32.075,13.125 ; v1(-31.55,23.025) MC1.49@-28.05,23.025 v1(-25.025,23.025) ; v1(-31.3,31.075) -29.75,29.525 MC1.62@-28.05,29.525 ; MC1.91@-30.815,44.279 -30.815,49.335 v1(-30.275,49.875) ; v1(-30.1,34.975) -29.65,34.525 MC1.72@-28.05,34.525 ; MC1.82@-28.05,39.525 -21.1,39.525 C16.2@-21.025,39.6 -21.45,40.025 v1(-22.225,40.025) ; v1(-24.45,20.325) -24.425,20.3 C24.2@-24.425,19.325 C14.2@-24.425,17.325 ; C20.2@-21.8,43.7 -21.825,43.675 v1(-21.825,42.65) -22.125,42.65 -22.75,43.275 -22.75,45.525 -22.45,45.825 -12.575,45.825 -12.15,45.4 R8.2@-12.15,43.65 R9.2@-10.625,43.65 ; C4.2@-21.011,35.925 -21.011,37.389 v1(-21,37.4) ; v1(-20.025,41.95) C21.2@-20.025,43.725 -18.1,43.725 C22.2@-18.075,43.7 ; C3.2@-19.8,23.025 -19.05,23.025 v1(-18.575,22.55) ; v1(-18.075,42.525) C22.2@-18.075,43.7 ; C22.2@-18.05,43.725 C22.2@-18.075,43.7 ; C15.2@-12.725,31.15 -12.725,31.725 -12.275,32.175 C23.2@-10.6,32.175 -10.6,33.05 v1(-10.675,33.125) ; -58.025,21.575 -58.025,16.055 R2.2@-55.885,13.915 -53.425,11.455 -53.425,10.06 C1.2@-53.805,9.68 ; -58.025,21.575 R1.2@-58.025,22.375 ; -48.15,54.85 -43.2,54.85 -42.315,53.965 -42.315,46.85
  L1 w1: v2(-104.125,2.75) -71.25,2.75 v2(-66.025,7.975)
  L3 w0.254: v1(-60.625,32.425) -60.05,32.425 v1(-58.325,34.15) ; v2(-54.875,62) -53.75,63.125 ; v1(-43.225,42.425) v1(-37.6,42.425) ; v1(-32.775,11.425) -32.775,8.975 -27.05,3.25 -22.8,3.25 -0.75,25.3 -0.75,47.225 -3.275,49.75 -11.3,49.75 -19.85,58.3 -34.7,58.3 -40.802,64.402 -49.467,64.402 -49.494,64.375 -52.5,64.375 -53.75,63.125 ; v1(-30.275,49.875) -28.1,47.7 v1(-28.1,43.45) -19,43.45 v1(-18.075,42.525) ; v1(-21.825,42.65) -22.25,42.225 v1(-33.325,42.225) -33.325,41 v1(-32.975,40.65) -21.6,40.65 ; v1(-21,37.4) -21.925,37.4 -22.225,37.7 v1(-22.225,40.025) -21.6,40.65 ; v1(-20.025,41.95) -21.325,40.65 -21.6,40.65 ; v1(-10.675,33.125) -10.675,39.7 -7.775,42.6 -4.1,42.6 -2.075,44.625 -2.075,47.05 -4.075,49.05 -11.85,49.05 -20.1,57.3 -35.775,57.3 -37.375,58.9 -37.375,59.775 -40.725,63.125 -53.75,63.125
  L3 w1: J1.6@-115.3,47.77 -118.2,50.67 -118.2,59.275 v2(-114.75,62.725)
  L2 w0.254: v1(-117.925,47.575) -115.495,47.575 J1.6@-115.3,47.77 -112.9,47.77 ST5.6@-111.74,46.61 ; ST5.5@-109.2,46.61 -109.2,46.675 -110.625,48.1 -110.625,53.05 v1(-107.45,56.225) ; v1(-97.45,59.4) -94.45,56.4 v1(-92.275,56.4) ; v1(-96.85,16.95) -89.825,16.95 -89.15,16.275 v1(-78.45,16.275) ; v1(-90.675,52.5) -85.15,46.975 v1(-64.675,46.975) ; S1.1@-66.075,17.65 -66.075,16.825 -64.525,15.275 v1(-63.475,15.275) ; v1(-63.1,32.425) v1(-60.625,32.425) ; v1(-58.325,34.15) -58.15,33.975 v1(-48.675,33.975) ; v1(-43.7,11.15) -41.05,11.15 v1(-41.05,11.175) ; v1(-35.2,11.3) -35.075,11.425 v1(-32.775,11.425) ; v1(-31.55,23.025) -31.552,23.027 -31.552,30.823 v1(-31.3,31.075) -30.375,31.075 v1(-30.1,30.8) ; v1(-30.1,34.975) v1(-30.1,30.8) ; v1(-29.65,38.475) -29.65,41.9 v1(-28.1,43.45) ; v1(-24.45,20.325) v1(-22.275,20.325) ; v1(-21,37.4) -24.55,33.85 -24.55,31.825 ; v1(-10.675,33.125) -13.4,33.125 -15.775,30.75 -22.7,30.75 -23.775,31.825 -24.55,31.825 ; v1(-30.1,30.8) -25.575,30.8 -24.55,31.825
  L2 w0.5: ST5.6@-111.74,46.61 ST5.5@-109.2,46.61
  L2 w0.8: -83.7,61.825 -69.775,61.825 -69.425,61.475 -55.4,61.475 v2(-54.875,62)
  L2 w1: v2(-114.75,62.725) v2(-92.9,62.725) -84.6,62.725 -83.7,61.825
  L4 w0.254: v1(-114.025,30) -114.025,32.725 -113.15,33.6 v1(-113.15,35.75) ; v1(-61.425,40.05) -62.5,40.05 -64.45,42 -64.45,55.3 -61.3,58.45 -56.75,58.45 -54.875,60.325 ; v1(-60.625,32.425) -57.55,32.425 -56.35,31.225 -56.35,25.775 -57.748,24.377 -57.748,24.358 -58.025,24.082 v1(-58.025,23.675) ; v1(-52.25,4.175) -50.144,6.281 C12.1@-42.731,6.281 -42.45,6.561 v1(-42.45,8.725) ; v1(-51.325,40.625) -51.325,42.725 -52,43.4 -52,44.175 v1(-52.575,44.75) ; v1(-47.45,55.675) -49.45,57.675 -53.125,57.675 -54.875,59.425 -54.875,60.325 ; IC2.43@-45.73,33.45 -48.15,33.45 v1(-48.675,33.975) -48.675,36.475 -50.45,38.25 ; IC2.49@-45.73,38.25 -50.45,38.25 ; v1(-44.075,46.85) -50.475,46.85 v1(-52.575,44.75) ; v1(-42.75,20.825) -42.748,20.823 -37.927,20.823 v1(-37.3,21.45) IC2.27@-35.57,21.45 -34.925,21.45 v1(-34.175,20.7) -31.525,20.7 ; v1(-37.6,42.425) -37.425,42.25 IC2.1@-35.57,42.25 -33.35,42.25 v1(-33.325,42.225) ; IC2.14@-35.57,31.85 -31.15,31.85 v1(-30.1,30.8) ; IC2.9@-35.57,35.85 -32.275,35.85 v1(-29.65,38.475) ; IC2.3@-35.57,40.65 v1(-32.975,40.65) ; v1(-35.2,11.3) -34.306,10.406 C10.1@-34.306,8.75 ; v1(-31.55,21.15) -31.55,20.725 -31.525,20.7 ; v1(-25.025,23.025) -24.45,22.45 v1(-24.45,20.325) -29.275,20.325 -29.65,20.7 -31.525,20.7 ; v1(-22.275,20.325) -20.8,20.325 v1(-18.575,22.55) ; v1(-21.825,42.65) -21.825,55.025 -28.802,62.002 -54.873,62.002 v2(-54.875,62) -54.875,60.325 ; v1(-52.575,44.75) -52.575,40.375 -50.45,38.25
  L4 w1: J1.6@-115.3,47.77 -116.88,49.35 -118.425,49.35 -119.15,48.625 -119.15,27.275 -115.45,23.575 -115.45,11.35 -106.85,2.75 v2(-104.125,2.75)
VCC2: C30.2 C31.2 C32.2 IC3.5 J1.7 J1.8 L1.1 ST3.4 ST4.3 ST5.7 ST5.8 | length 136.7
  L1 w0.254: C32.2@-95.3,19.9 -96.025,20.625 -96.025,23.475 -95.175,24.325 IC3.5@-94.525,24.325
  L1 w0.5: J1.7@-115.3,50.31 -113.45,48.46 -113.45,45.78 ST5.8@-111.74,44.07 ST5.7@-109.2,44.07 ST5.7@-109.12,44.07 ; v2(-101.65,33.95) -101.65,35.7 -103.525,37.575 -107.2,37.575 -107.75,38.125 -107.75,42.7 ST5.7@-109.12,44.07 ; C32.2@-95.3,19.9 -94.55,19.9 v2(-93.475,20.975) ; v2(-87.975,25.95) -87.975,41.15 -87.85,41.275 -87.708,41.275 -80.075,48.908 -80.075,49.7 C30.2@-78.7,51.075 ; C31.2@-77.675,48.325 -78.7,49.35 C30.2@-78.7,51.075 ; ST5.7@-109.12,44.07 -105.755,44.07 -105.35,44.475 -93.9,44.475 -85.7,52.675 -80.3,52.675 C30.2@-78.7,51.075
  L1 w1: J1.7@-115.3,50.31 J1.8@-115.3,52.85
  L3 w0.5: v2(-93.475,20.975) -92.95,20.975 v2(-87.975,25.95)
  L2 w0.254: v1(-108.7,31.125) -107.475,29.9 v1(-106.55,29.9) ; L1.1@-102.6,31.68 -100.145,31.68 v1(-97.95,33.875)
  L4 w0.254: v1(-108.7,31.125) -108.525,30.95 ST4.3@-108.525,28.125 ; v1(-106.55,29.9) -106.525,29.925 -106.525,31.25 -106.095,31.68 L1.1@-102.6,31.68 ; v1(-97.95,33.875) -97.25,34.575 ST3.4@-97.25,40.175
  L4 w0.5: L1.1@-102.6,31.68 -102.6,33 v2(-101.65,33.95)
pads on no net: IC2.36 IC2.40 MC1.2 MC1.8 MC1.13 MC1.25 MC1.33 MC1.40 MC1.44 MC1.45 MC1.50 MC1.54 MC1.55 MC1.83 MC1.86 MC1.87 MC1.88 MC1.89 MC1.92 MC1.93 MC1.94 MC1.95 MC1.99 MC1.100 MC1.101 MC1.106 MC1.107 MC1.115 MC1.116 MC1.117 MC1.118 MC1.119 MC1.122 MC1.123 MC1.128 MC1.130 MC1.131 MC1.134 MC1.139 MC1.140 MC1.141 MC1.144 MC1.147 MC1.151 MC1.152 MC1.153 MC1.156 MC1.157 MC1.163 MC1.165 MC1.167 MC1.174 MC1.176 PS1.0 PS2.0 PS3.0 PS4.0 PS5.0 PS6.0 S1.2 S1.4 ST2.0 ST2.5 ST2.7 ST3.0 ST3.37 ST3.38 ST3.39 ST3.40 ST4.0

## Silkscreen, mask and mechanical layers (free items; w line width, h text height)
Top Overlay:
  the board outline again, w0.1